# Altium PCB FLATSAT.PcbDoc (part 2 of 2)
Units mil, origin at the board's own origin, x right, y up, seen from the top; angles counter-clockwise.
Board outline 6000 x 4000 mil, 2 copper layers (Top Layer, Bottom Layer); 608 components, 657 nets, 2575 pads, 7 vias.
Unrouted connection lines stored in the file: 1377.
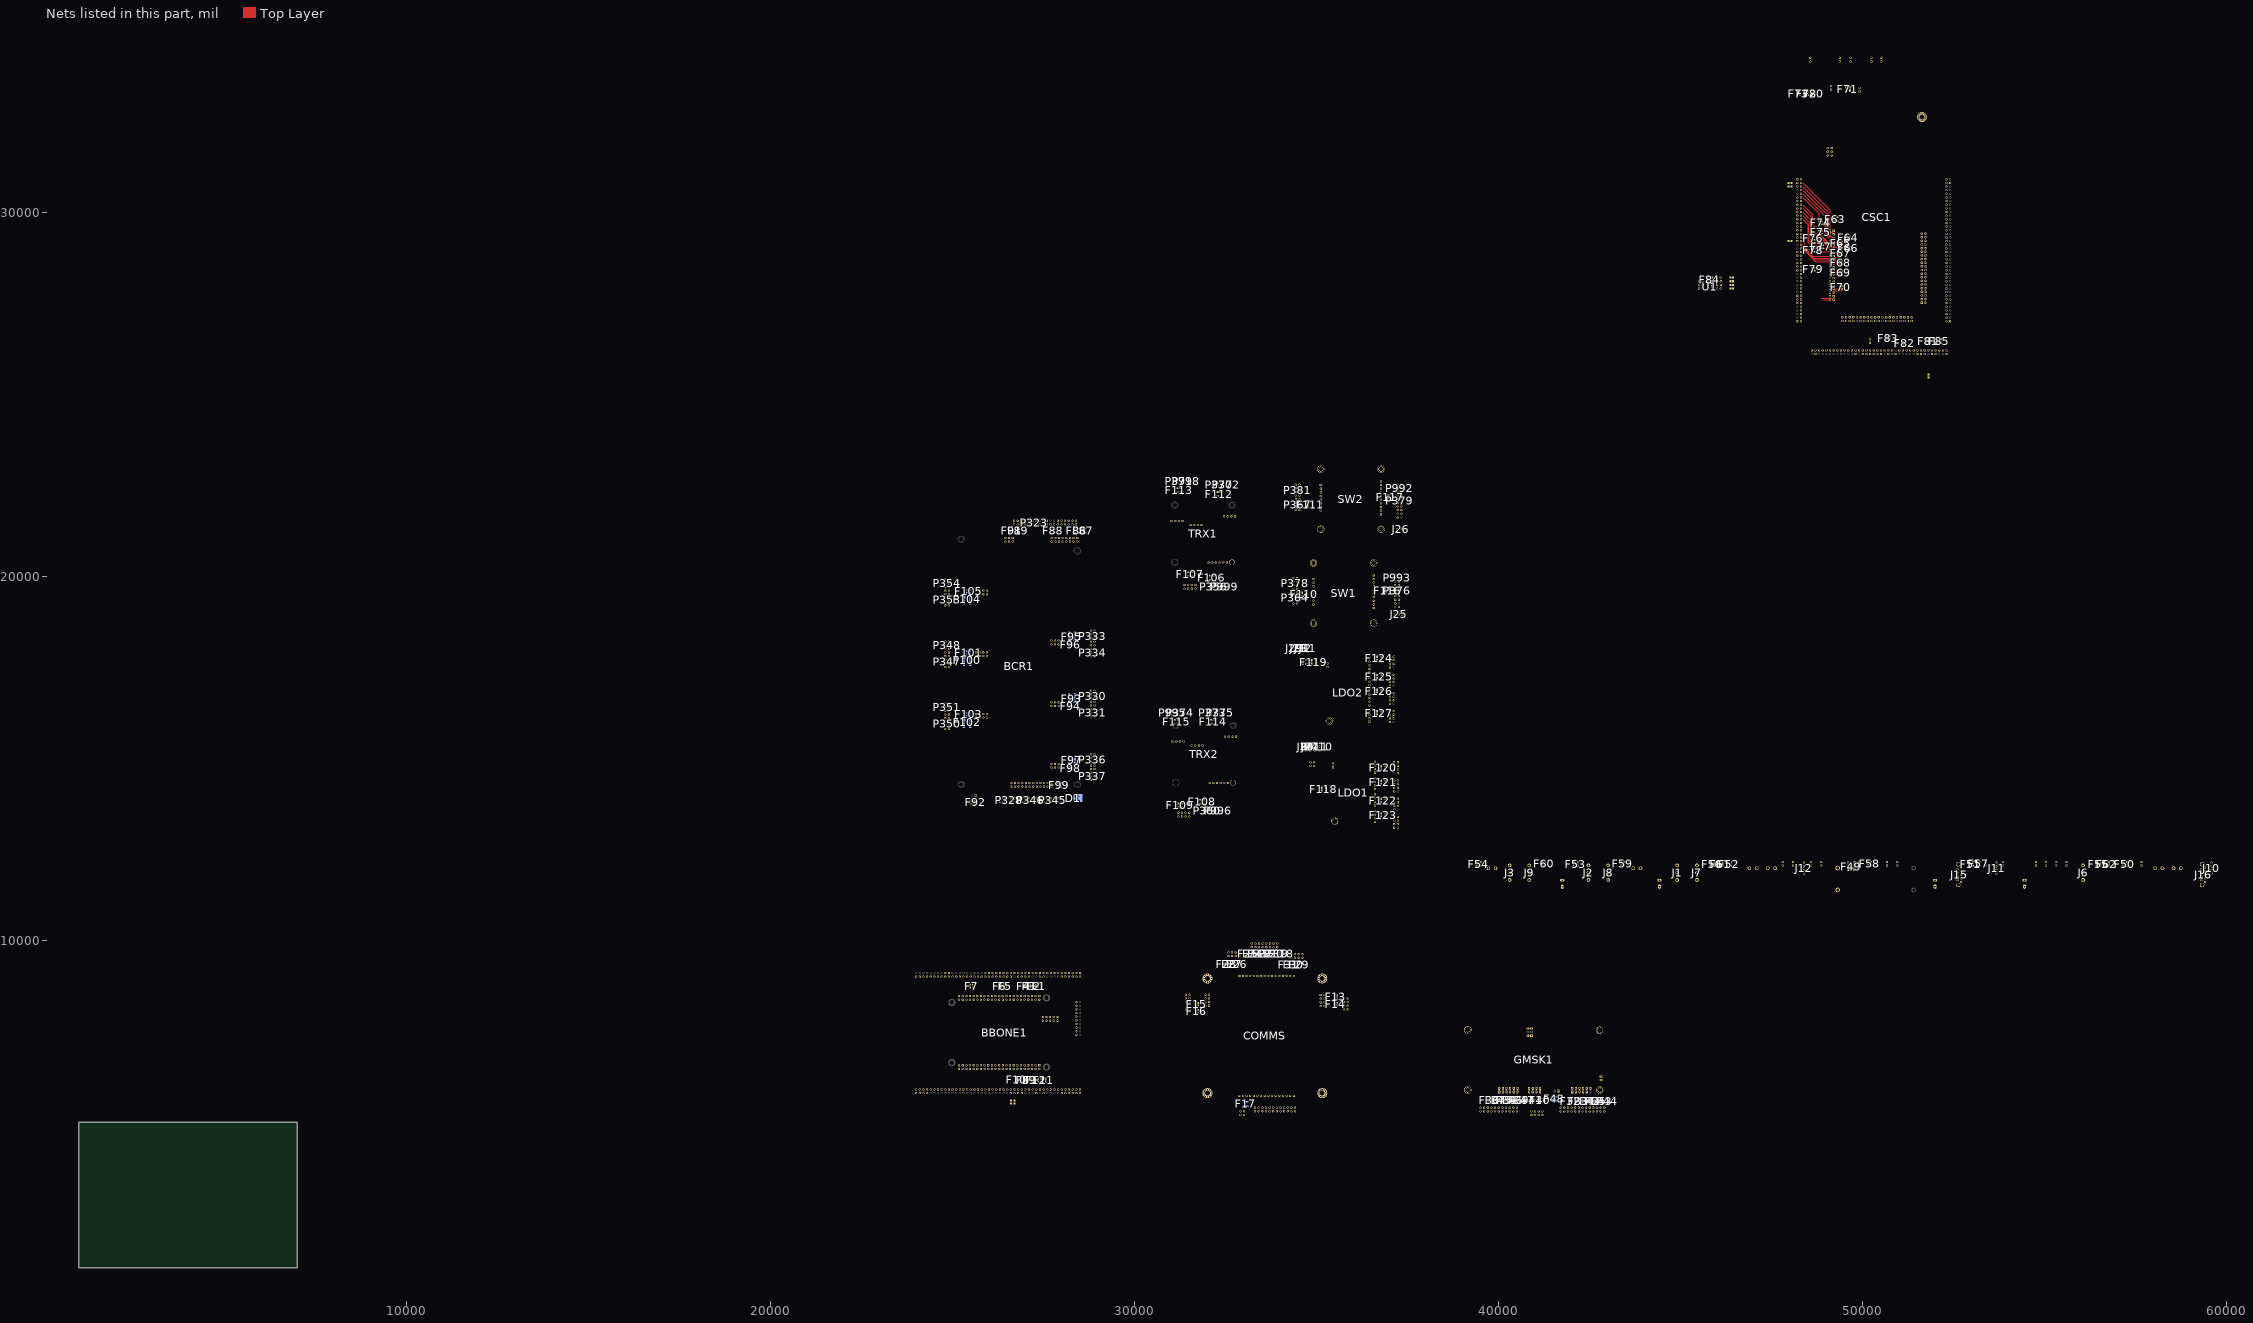
[diagram p2: the nets of this part, all layers, seen from the top]

## Footprints (in the part's own frame and the unit in brackets; to place one, negate y for a bottom-side part, rotate by r counter-clockwise, add the part's x,y. Pads: shape width x height; smd on the part's side, far side on the other; paste and mask are expansions set on the pad) (continued)
TRX_REGULATOR [mm]
  round 1.5 hole 0.9: 1(27.018,2.962) 1(29.558,2.962) 1(32.098,2.962) 2(3.65,32.045) 2(34.638,2.962) 2(37.178,2.962) 2(42.791,35.27) 3(19.474,29.149) 4(16.934,29.149) 5(37.711,35.27) 5(40.251,35.27) 6(6.19,32.045) 6(8.73,32.045) 7(14.394,29.149)
  rect 1.5x1.5 hole 0.9: 2(1.11,32.045) 2(22.014,29.149) 2(39.718,2.962) 2(45.331,35.27)
  round 4 hole 3.5: 4(43.291,3.161)
  round 5 hole 3: 8C(3.291,3.161) 8C(3.291,43.161) 8C(43.291,43.161)
  round 1 hole 0.3: GND(1.291,3.161) GND(1.291,43.161) GND(1.559,2.161) GND(1.559,4.161) GND(1.559,42.161) GND(1.559,44.161) GND(2.291,1.429) GND(2.291,4.893) GND(2.291,41.429) GND(2.291,44.893) GND(3.291,1.161) GND(3.291,5.161) GND(3.291,41.161) GND(3.291,45.161) GND(4.291,1.429) GND(4.291,4.893) GND(4.291,41.429) GND(4.291,44.893) GND(5.023,2.161) GND(5.023,4.161) GND(5.023,42.161) GND(5.023,44.161) GND(5.291,3.161) GND(5.291,43.161) GND(41.291,43.161) GND(41.559,42.161) GND(41.559,44.161) GND(42.291,41.429) GND(42.291,44.893) GND(43.291,41.161) GND(43.291,45.161) GND(44.291,41.429) GND(44.291,44.893) GND(45.023,42.161) GND(45.023,44.161) GND(45.291,43.161)
  silkscreen extent -0.41,-0.54 46.98,46.86
TSSOP50P310X90-8N [mm] "TSSOP, 8-Leads, Body 2.1x2.4mm (max), Pitch 0.50mm, IPC Medium Density"
  oval 1.25x0.3 smd mask+0.102: 1(-1.325,0.75) 2(-1.325,0.25)
  oval 1.25x0.3 smd: 3(-1.325,-0.25) 4(-1.325,-0.75) 5(1.325,-0.75) 6(1.325,-0.25) 7(1.325,0.25) 8(1.325,0.75)
  silkscreen extent -1.45,-1.05 0.3,1.57, body extent -1.2,-1.05 1.2,1.05, height 0.9

## Part data
C1: library part "0805 MLCC - X7R, 10%", "0805 MLCC - X7R, 10%"
CSC1: library part CSC
D1: library part "D Schottky", "Schottky Diode"
J1 J2 J3 J6 J7 J8 J9 J25 J26 J27 J28 J29 J30 J31 J32 P410 P411: library part "Header 3", "Header, 3-Pin"
J4 J5: library part Socket, "Socket"
J10 J11 J12: library part "Header 4", "Header, 4-Pin"
J13 J14 J17 J18 J23 J24: library part "Header 2", "Header, 2-Pin"
J15 J16: library part "D Connector 9", "Receptacle Assembly, 9 Position, Right Angle"
J19 J20 J21 J22: "RCA Phono Jack, Right Angle, Thru-Hole, Snap-In"
LDO1 LDO2: library part LDO
R1 R2 R3 R4 R5 R6 R7 R8 R9: library part "1206 Thick Film Resistor 1%", "1206 Thick Film Resistor 1%"
SW1 SW2: library part LVSWITCHER

## Via types
v1: diameter 19.68, hole 11.81, Top Layer to Bottom Layer, tented bottom, 5 vias
v2: diameter 27.56, hole 11.81, Top Layer to Bottom Layer, tented both sides, 2 vias

## Nets (pads, with @x,y where several pads share a name; then routed paths per layer and width w, separated by ;. In a path a pad name is that pad's centre, name@x,y a point inside that pad or via, vN(x,y) a via of type N, cw(c..) or ccw(c..) an arc to the next point about the centre after c; other vN are vias at no path point)
3V3_AUX: F53.1 P395.2
3V3_AUX_E\N\: P396.2 P411.2
3V3_BBONE: F52.1 P49.1 P50.1 R1.1 R2.1
3V3_COMMS: P123.1 P167.2 P389.2
3V3_CSC: F51.1 P173.1 P187.1 P207.1 P234.1 P274.1 P277.1 P392.2 R5.1 R6.1
3V3_PWR: P182.1 P321.1 P357.2 P361.2 P386.2 R3.1 R4.1
3V3_UNREG: J27.1 J30.1 P376.2 P382.1 P410.1 P411.1
5V0_AUX: F54.1 P407.2
5V0_AUX_E\N\: J32.2 P408.2
5V0_BBONE: P51.1 P52.1 P183.1 P404.2
5V0_BCR: P322.1 P398.2
5V0_TELEM: F50.1 P174.1 P401.2 R7.1 R8.1 R9.1
5V0_UNREG: J28.1 J29.1 J31.1 J32.1 P379.2 P383.1
8V0_RX1: F56.1 P370.2
8V0_RX2: F61.1 P373.2
AFSK1_DET: P108.1 P203.1
AFSK1_M0: P134.2 P256.2
AFSK1_M1: P135.2 P237.1
AFSK1_RX: P238.1
AFSK1_RXD: P133.2
AFSK1_TX: P257.2
AFSK1_TXD: P136.2
AFSK2_DET: P114.1 P199.1
AFSK2_M0: P138.2 P226.2
AFSK2_M1: P139.2 P204.1
AFSK2_RX: P239.1
AFSK2_RXD: P137.2
AFSK2_TX: P258.2
AFSK2_TXD: P140.2
BBONE_E\N\: J31.2 P405.2
BBONE_I2C2_SCL: J12.2 P65.1 R2.2
BBONE_I2C2_SDA: J12.3 P66.1 R1.2
BCR_E\N\: J28.2 P399.2
BCR_MISO: P180.1 P221.2 P326.1
BCR_MOSI: P181.1 P222.2 P327.1
BCR_R\S\T\: P178.1 P197.1 P324.1
BCR_SCK: P179.1 P220.2 P325.1
COMMS_E\N\: P390.2 P410.2
CSC_E\N\: J30.2 P393.2
CSC_ISP: P172.1 P232.2
CSC_RST: P171.1 P209.1
DTMF1Q1: P103.1 P212.2
DTMF1Q2: P104.1 P190.1
DTMF1Q3: P105.1 P213.2
DTMF1Q4: P106.1 P191.1
DTMF1ST: P107.1 P214.2
DTMF2Q1: P109.1 P192.1
DTMF2Q2: P110.1 P215.2
DTMF2Q3: P111.1 P193.1
DTMF2Q4: P112.1 P216.2
DTMF2ST: P113.1 P194.1
GND: C1.1 F1.3 F2.3 F3.3 F4.3 F5.3 F6.3 F7.3 F8.3 F9.3 F10.3 F11.3 F12.3 F13.3 F14.3 F15.3 F16.3 F17.3 F18.3 F19.3 F20.3 F21.3 F22.3 F23.3 F24.3 F25.3 F26.3 F27.3 F28.3 F29.3 F30.3 F31.3 F32.3 F33.3 F34.3 F35.3 F36.3 F37.3 F38.3 F39.3 F40.3 F41.3 F42.3 F43.3 F44.3 F45.3 F46.3 F47.3 F48.3 F49.3 F50.3 F51.3 F52.3 F53.3 F54.3 F55.3 F56.3 F57.3 F58.3 F59.3 F60.3 F61.3 F62.3 F63.3 F64.3 F65.3 F66.3 F67.3 F68.3 F69.3 F70.3 F71.3 F72.3 F73.3 F74.3 F75.3 F76.3 F77.3 F78.3 F79.3 F80.3 F81.3 F82.3 F83.3 F84.3 F85.3 F86.3 F87.3 F88.3 F89.3 F91.3 F92.3 F93.3 F94.3 F95.3 F96.3 F97.3 F98.3 F99.3 F100.3 F101.3 F102.3 F103.3 F104.3 F105.3 F107.3 F108.3 F109.3 F110.3 F111.3 F113.3 F114.3 F115.3 F116.3 F117.3 F118.3 F119.3 F120.3 F121.3 F122.3 F123.3 F124.3 F125.3 F126.3 F127.3 J1.2 J2.2 J3.2 J5.1 J6.2 J7.2 J8.2 J9.2 J10.4 J11.4 J12.4 J13.2 J14.2 J15.10 J15.11 J16.10 J16.11 J17.2 J18.2 J19.1A J20.1A J21.1A J22.1A J23.2 J24.2 J25.1 J26.1 J27.3 J28.3 J29.3 J30.3 J31.3 J32.3 P1.1 P2.1 P47.1 P48.1 P89.1 P90.1 P91.1 P92.1 P124.1 P168.2 P177.1 P186.1 P229.2 P230.2 P233.2 P273.2 P320.2 P323.1 P331.1 P334.1 P337.1 P346.2 P348.2 P351.2 P354.2 P372.2 P375.2 P378.2 P381.2 P384.1 P385.1 P410.3 P411.3 P984.1 P985.1 P986.1 P987.1 P988.1 P989.1 P990.1 P991.1 P992.2 P993.2 P994.2 P995.2 P996.2 P997.2 P998.2 P999.2 U1.1 | length 151.9
  Top Layer w10: v2(48525,28975) 48589.37,28910.63 F78.3@48600,28910.63 ; v2(48550,29235) 48599.37,29235 F76.3@48600,29235.63
I2C0_SCL: P188.1 P340.2 P359.1 P363.1 R4.2
I2C0_SDA: P210.2 P339.2 P358.1 P362.1 R3.2
I2C1_SCL: J11.2 P63.1 P184.1 P195.1
I2C1_SDA: J11.3 P64.1 P185.1 P217.2
I2C2_SCL: P175.1 P218.2 P275.1 P341.2 R6.2
I2C2_SCL_5V: J10.2 P299.2 R8.2
I2C2_SDA: P176.1 P235.1 P276.1 P342.2 R5.2
I2C2_SDA_5V: J10.3 P300.2 R7.2
NetBBONE1_A01: BBONE1.A01 P1.2
NetBBONE1_A02: BBONE1.A02 P2.2
NetBBONE1_A03: BBONE1.A03 F1.2
NetBBONE1_A04: BBONE1.A04 F2.2
NetBBONE1_A05: BBONE1.A05 F3.2
NetBBONE1_A06: BBONE1.A06 F4.2
NetBBONE1_A07: BBONE1.A07 P7.2
NetBBONE1_A08: BBONE1.A08 P8.2
NetBBONE1_A09: BBONE1.A09 P9.2
NetBBONE1_A10: BBONE1.A10 P10.2
NetBBONE1_A11: BBONE1.A11 P11.2
NetBBONE1_A12: BBONE1.A12 P12.2
NetBBONE1_A13: BBONE1.A13 P13.2
NetBBONE1_A14: BBONE1.A14 P14.2
NetBBONE1_A15: BBONE1.A15 P15.2
NetBBONE1_A16: BBONE1.A16 P16.2
NetBBONE1_A17: BBONE1.A17 P17.2
NetBBONE1_A18: BBONE1.A18 P18.2
NetBBONE1_A19: BBONE1.A19 P19.2
NetBBONE1_A20: BBONE1.A20 F5.2
NetBBONE1_A21: BBONE1.A21 F6.2
NetBBONE1_A22: BBONE1.A22 P22.2
NetBBONE1_A23: BBONE1.A23 P23.2
NetBBONE1_A24: BBONE1.A24 P24.2
NetBBONE1_A25: BBONE1.A25 P25.2
NetBBONE1_A26: BBONE1.A26 P26.2
NetBBONE1_A27: BBONE1.A27 P27.2
NetBBONE1_A28: BBONE1.A28 P28.2
NetBBONE1_A29: BBONE1.A29 P29.2
NetBBONE1_A30: BBONE1.A30 P30.2
NetBBONE1_A31: BBONE1.A31 P31.2
NetBBONE1_A32: BBONE1.A32 P32.2
NetBBONE1_A33: BBONE1.A33 P33.2
NetBBONE1_A34: BBONE1.A34 P34.2
NetBBONE1_A35: BBONE1.A35 P35.2
NetBBONE1_A36: BBONE1.A36 P36.2
NetBBONE1_A37: BBONE1.A37 P37.2
NetBBONE1_A38: BBONE1.A38 F7.2
NetBBONE1_A39: BBONE1.A39 P39.2
NetBBONE1_A40: BBONE1.A40 P40.2
NetBBONE1_A41: BBONE1.A41 P41.2
NetBBONE1_A42: BBONE1.A42 P42.2
NetBBONE1_A43: BBONE1.A43 P43.2
NetBBONE1_A44: BBONE1.A44 P44.2
NetBBONE1_A45: BBONE1.A45 P45.2
NetBBONE1_A46: BBONE1.A46 P46.2
NetBBONE1_B01: BBONE1.B01 P47.2
NetBBONE1_B02: BBONE1.B02 P48.2
NetBBONE1_B03: BBONE1.B03 F11.1
NetBBONE1_B04: BBONE1.B04 F12.1
NetBBONE1_B05: BBONE1.B05 F8.2
NetBBONE1_B06: BBONE1.B06 F9.2
NetBBONE1_B07: BBONE1.B07 P53.2
NetBBONE1_B08: BBONE1.B08 P54.2
NetBBONE1_B09: BBONE1.B09 P55.2
NetBBONE1_B10: BBONE1.B10 P56.2
NetBBONE1_B11: BBONE1.B11 F10.2
NetBBONE1_B12: BBONE1.B12 P58.2
NetBBONE1_B13: BBONE1.B13 P59.2
NetBBONE1_B14: BBONE1.B14 P60.2
NetBBONE1_B15: BBONE1.B15 P61.2
NetBBONE1_B16: BBONE1.B16 P62.2
NetBBONE1_B17: BBONE1.B17 P63.2
NetBBONE1_B18: BBONE1.B18 P64.2
NetBBONE1_B19: BBONE1.B19 P65.2
NetBBONE1_B20: BBONE1.B20 P66.2
NetBBONE1_B21: BBONE1.B21 P67.2
NetBBONE1_B22: BBONE1.B22 P68.2
NetBBONE1_B23: BBONE1.B23 P69.2
NetBBONE1_B24: BBONE1.B24 P70.2
NetBBONE1_B25: BBONE1.B25 P71.2
NetBBONE1_B26: BBONE1.B26 P72.2
NetBBONE1_B27: BBONE1.B27 P73.2
NetBBONE1_B28: BBONE1.B28 P74.2
NetBBONE1_B29: BBONE1.B29 P75.2
NetBBONE1_B30: BBONE1.B30 P76.2
NetBBONE1_B31: BBONE1.B31 P77.2
NetBBONE1_B32: BBONE1.B32 P78.2
NetBBONE1_B33: BBONE1.B33 P79.2
NetBBONE1_B34: BBONE1.B34 P80.2
NetBBONE1_B35: BBONE1.B35 P81.2
NetBBONE1_B36: BBONE1.B36 P82.2
NetBBONE1_B37: BBONE1.B37 P83.2
NetBBONE1_B38: BBONE1.B38 P84.2
NetBBONE1_B39: BBONE1.B39 P85.2
NetBBONE1_B40: BBONE1.B40 P86.2
NetBBONE1_B41: BBONE1.B41 P87.2
NetBBONE1_B42: BBONE1.B42 P88.2
NetBBONE1_B43: BBONE1.B43 P89.2
NetBBONE1_B44: BBONE1.B44 P90.2
NetBBONE1_B45: BBONE1.B45 P91.2
NetBBONE1_B46: BBONE1.B46 P92.2
NetBBONE1_P01: BBONE1.P01 P93.2
NetBBONE1_P02: BBONE1.P02 P94.2
NetBBONE1_P03: BBONE1.P03 P95.2
NetBBONE1_P04: BBONE1.P04 P96.2
NetBBONE1_P05: BBONE1.P05 P97.2
NetBBONE1_P06: BBONE1.P06 P98.2
NetBBONE1_P07: BBONE1.P07 P99.2
NetBBONE1_P08: BBONE1.P08 P100.2
NetBBONE1_P09: BBONE1.P09 P101.2
NetBBONE1_P10: BBONE1.P10 P102.2
NetBCR1_1: BCR1.1 F86.2
NetBCR1_2: BCR1.2 F87.2
NetBCR1_3: BCR1.3 P323.2
NetBCR1_4: BCR1.4 F88.2
NetBCR1_5: BCR1.5 P339.1
NetBCR1_6: BCR1.6 P340.1
NetBCR1_7: BCR1.7 P341.1
NetBCR1_8: BCR1.8 P342.1
NetBCR1_9: BCR1.9 P343.1
NetBCR1_10: BCR1.10 P344.1
NetBCR1_11: BCR1.11 P328.2
NetBCR1_12: BCR1.12 F92.2
NetBCR1_13: BCR1.13 F99.1
NetBCR1_14: BCR1.14 P346.1
NetBCR1_15: BCR1.15 F93.2
NetBCR1_16: BCR1.16 P331.2
NetBCR1_17: BCR1.17 F94.2
NetBCR1_18: BCR1.18 F95.2
NetBCR1_19: BCR1.19 P334.2
NetBCR1_20: BCR1.20 F96.2
NetBCR1_21: BCR1.21 F97.2
NetBCR1_22: BCR1.22 P337.2
NetBCR1_23: BCR1.23 F98.2
NetBCR1_24: BCR1.24 F100.2
NetBCR1_25: BCR1.25 P348.1
NetBCR1_26: BCR1.26 F101.2
NetBCR1_27: BCR1.27 F102.2
NetBCR1_28: BCR1.28 P351.1
NetBCR1_29: BCR1.29 F103.2
NetBCR1_30: BCR1.30 F104.2
NetBCR1_31: BCR1.31 P354.1
NetBCR1_32: BCR1.32 F105.2
NetBCR1_33: BCR1.33 F89.2
NetBCR1_34: BCR1.34 P326.2
NetBCR1_35: BCR1.35 F91.2
NetC1_2: C1.2 P297.2 P298.2 R9.2
NetCOMMS_AFSK1_M0: COMMS.AFSK1_M0 F26.2
NetCOMMS_AFSK1_M1: COMMS.AFSK1_M1 F27.2
NetCOMMS_AFSK1_RXD: COMMS.AFSK1_RXD P133.1
NetCOMMS_AFSK1_TXD: COMMS.AFSK1_TXD F28.2
NetCOMMS_AFSK2_M0: COMMS.AFSK2_M0 F29.2
NetCOMMS_AFSK2_M1: COMMS.AFSK2_M1 F30.2
NetCOMMS_AFSK2_RXD: COMMS.AFSK2_RXD P137.1
NetCOMMS_AFSK2_TXD: COMMS.AFSK2_TXD F31.2
NetCOMMS_DTMF1_ES: COMMS.DTMF1_ES P108.2
NetCOMMS_DTMF1_Q1: COMMS.DTMF1_Q1 P103.2
NetCOMMS_DTMF1_Q2: COMMS.DTMF1_Q2 P104.2
NetCOMMS_DTMF1_Q3: COMMS.DTMF1_Q3 P105.2
NetCOMMS_DTMF1_Q4: COMMS.DTMF1_Q4 P106.2
NetCOMMS_DTMF1_ST: COMMS.DTMF1_ST P107.2
NetCOMMS_DTMF2_ES: COMMS.DTMF2_ES P114.2
NetCOMMS_DTMF2_Q1: COMMS.DTMF2_Q1 P109.2
NetCOMMS_DTMF2_Q2: COMMS.DTMF2_Q2 P110.2
NetCOMMS_DTMF2_Q3: COMMS.DTMF2_Q3 P111.2
NetCOMMS_DTMF2_Q4: COMMS.DTMF2_Q4 P112.2
NetCOMMS_DTMF2_ST: COMMS.DTMF2_ST P113.2
NetCOMMS_GMSK_RX1: COMMS.GMSK_RX1 P117.2
NetCOMMS_GMSK_RX2: COMMS.GMSK_RX2 P118.2
NetCOMMS_GMSK_TX1: COMMS.GMSK_TX1 F13.2
NetCOMMS_GMSK_TX2: COMMS.GMSK_TX2 F14.2
NetCOMMS_GND: COMMS.GND P124.2
NetCOMMS_RX1: COMMS.RX1 F15.2
NetCOMMS_RX2: COMMS.RX2 F16.2
NetCOMMS_S0: COMMS.S0 F18.2
NetCOMMS_S1: COMMS.S1 F19.2
NetCOMMS_S2: COMMS.S2 F20.2
NetCOMMS_S3: COMMS.S3 F21.2
NetCOMMS_S4: COMMS.S4 F22.2
NetCOMMS_S5: COMMS.S5 F23.2
NetCOMMS_S6: COMMS.S6 F24.2
NetCOMMS_S7: COMMS.S7 F25.2
NetCOMMS_TX1: COMMS.TX1 P119.2
NetCOMMS_TX2: COMMS.TX2 P120.2
NetCOMMS_VCC: COMMS.VCC F17.2
NetCSC1_C1_1: CSC1.C1_1 F63.2
NetCSC1_C1_2: CSC1.C1_2 P210.1 | length 1623.2
  Top Layer w10: 48350,30800 49099.68,30050.31 CSC1.C1_2@49099.68,29487.36
NetCSC1_C1_3: CSC1.C1_3 P188.2 | length 1700.6
  Top Layer w10: 48350,30700 49050,30000 49050,29475.56 49081.67,29443.88 49143.17,29443.88 CSC1.C1_3@49199.68,29387.36
NetCSC1_C1_4: CSC1.C1_4 P211.1 | length 1544.9
  Top Layer w10: 48350,30600 49025,29925 49025,29425 49062.64,29387.36 CSC1.C1_4@49099.68,29387.36
NetCSC1_C1_5: CSC1.C1_5 P189.2 | length 1615.6
  Top Layer w10: 48350,30500 49000,29850 49000,29400 49069.16,29330.84 49117.7,29330.84 49161.18,29287.36 CSC1.C1_5@49199.68,29287.36
NetCSC1_C1_6: CSC1.C1_6 F74.2 | length 522
  Top Layer w10: F74.2@48878.74,29660.63 48939.37,29660.63 48975,29625 48975,29375 49062.64,29287.36 CSC1.C1_6@49099.68,29287.36
NetCSC1_C1_7: CSC1.C1_7 F64.2
NetCSC1_C1_8: CSC1.C1_8 F75.2 | length 351.1
  Top Layer w10: F75.2@48878.74,29410.63 48878.74,29346.26 49037.64,29187.36 CSC1.C1_8@49099.68,29187.36
NetCSC1_C1_9: CSC1.C1_9 F65.2
NetCSC1_C1_10: CSC1.C1_10 F76.2 | length 482.4
  Top Layer w10: F76.2@48678.74,29235.63 48889.37,29235.63 49037.64,29087.36 CSC1.C1_10@49099.68,29087.36
NetCSC1_C1_11: CSC1.C1_11 F66.2
NetCSC1_C1_12: CSC1.C1_12 F77.2 | length 230.6
  Top Layer w10: F77.2@48878.74,29010.63 49076.42,29010.63 CSC1.C1_12@49099.68,28987.36
NetCSC1_C1_13: CSC1.C1_13 F67.2 | length 188.3
  Top Layer w10: CSC1.C1_13@49199.68,28887.36 49262.64,28887.36 49328.74,28821.26 F67.2@49360.63,28821.26
NetCSC1_C1_14: CSC1.C1_14 F78.2 | length 430.6
  Top Layer w10: F78.2@48678.74,28910.63 49076.42,28910.63 CSC1.C1_14@49099.68,28887.36
NetCSC1_C1_15: CSC1.C1_15 F68.2 | length 330.7
  Top Layer w10: CSC1.C1_15@49199.68,28787.36 49250,28737.05 49250,28600 49278.74,28571.26 F68.2@49360.63,28571.26
NetCSC1_C1_16: CSC1.C1_16 P217.1 | length 1202.2
  Top Layer w10: 48350,29400 48400,29350 48400,29067.88 48473,28994.88 48473,28942.51 48631.56,28783.94 49096.27,28783.94 CSC1.C1_16@49099.68,28787.36
NetCSC1_C1_17: CSC1.C1_17 P195.2 | length 1014
  Top Layer w10: 48375,29070.25 48457,28988.25 48457,28935.88 48657.88,28735 49152.05,28735 CSC1.C1_17@49199.68,28687.36
NetCSC1_C1_18: CSC1.C1_18 P218.1 | length 964.9
  Top Layer w10: P218.1@48300,29175 P218.1@48300,29200 ; 48350,29072.63 48441,28981.63 48441,28929.25 48682.89,28687.36 CSC1.C1_18@49099.68,28687.36
NetCSC1_C1_19: CSC1.C1_19 P196.2 | length 1142.7
  Top Layer w10: P196.2@48300,29100 48425,28975 48425,28922.63 48712.63,28635 49152.05,28635 CSC1.C1_19@49199.68,28587.36
NetCSC1_C1_20: CSC1.C1_20 P219.1
NetCSC1_C1_21: CSC1.C1_21 P197.2
NetCSC1_C1_22: CSC1.C1_22 P220.1
NetCSC1_C1_23: CSC1.C1_23 P198.2
NetCSC1_C1_24: CSC1.C1_24 F79.2
NetCSC1_C1_25: CSC1.C1_25 F69.2 | length 159.8
  Top Layer w10: CSC1.C1_25@49199.68,28287.36 F69.2@49359.53,28287.36
NetCSC1_C1_26: CSC1.C1_26 P222.1
NetCSC1_C1_27: CSC1.C1_27 P200.2
NetCSC1_C1_28: CSC1.C1_28 P223.1
NetCSC1_C1_29: CSC1.C1_29 P201.2
NetCSC1_C1_30: CSC1.C1_30 P224.1 | length 4.8
  Top Layer w10: CSC1.C1_30@49096.32,28084 CSC1.C1_30@49099.68,28087.36
NetCSC1_C1_31: CSC1.C1_31 P202.2
NetCSC1_C1_32: CSC1.C1_32 P225.1
NetCSC1_C1_33: CSC1.C1_33 F70.2 | length 157
  Top Layer w10: CSC1.C1_33@49199.68,27887.36 F70.2@49356.73,27887.36
NetCSC1_C1_34: CSC1.C1_34 P226.1
NetCSC1_C1_35: CSC1.C1_35 P204.2
NetCSC1_C1_36: CSC1.C1_36 P227.1
NetCSC1_C1_37: CSC1.C1_37 P205.2 | length 61.5
  Top Layer w10: 49156.2,27730.84 CSC1.C1_37@49199.68,27687.36
NetCSC1_C1_38: CSC1.C1_38 P228.1
NetCSC1_C1_39: CSC1.C1_39 P206.2 | length 359.4
  Top Layer w10: 48860,27635 49140,27635 49187.64,27587.36 CSC1.C1_39@49199.68,27587.36
NetCSC1_C1_40: CSC1.C1_40 P229.1 | length 187.3
  Top Layer w10: 48912.36,27587.36 CSC1.C1_40@49099.68,27587.36
NetCSC1_C2_1: CSC1.C2_1 F81.2
NetCSC1_C2_2: CSC1.C2_2 P254.1
NetCSC1_C2_3: CSC1.C2_3 P235.2
NetCSC1_C2_4: CSC1.C2_4 P255.1
NetCSC1_C2_5: CSC1.C2_5 P236.2
NetCSC1_C2_6: CSC1.C2_6 P256.1
NetCSC1_C2_7: CSC1.C2_7 P237.2
NetCSC1_C2_8: CSC1.C2_8 P257.1
NetCSC1_C2_9: CSC1.C2_9 F82.2
NetCSC1_C2_10: CSC1.C2_10 P258.1
NetCSC1_C2_11: CSC1.C2_11 F83.2
NetCSC1_C2_12: CSC1.C2_12 P259.1
NetCSC1_C2_13: CSC1.C2_13 P240.2
NetCSC1_C2_14: CSC1.C2_14 P260.1
NetCSC1_C2_15: CSC1.C2_15 P241.2
NetCSC1_C2_16: CSC1.C2_16 P261.1
NetCSC1_C2_17: CSC1.C2_17 P242.2
NetCSC1_C2_18: CSC1.C2_18 P262.1
NetCSC1_C2_19: CSC1.C2_19 P243.2
NetCSC1_C2_20: CSC1.C2_20 P263.1
NetCSC1_C2_21: CSC1.C2_21 P244.2
NetCSC1_C2_22: CSC1.C2_22 P264.1
NetCSC1_C2_23: CSC1.C2_23 P245.2
NetCSC1_C2_24: CSC1.C2_24 P265.1
NetCSC1_C2_25: CSC1.C2_25 P246.2
NetCSC1_C2_26: CSC1.C2_26 P266.1
NetCSC1_C2_27: CSC1.C2_27 P247.2
NetCSC1_C2_28: CSC1.C2_28 P267.1
NetCSC1_C2_29: CSC1.C2_29 P248.2
NetCSC1_C2_30: CSC1.C2_30 P268.1
NetCSC1_C2_31: CSC1.C2_31 P249.2
NetCSC1_C2_32: CSC1.C2_32 P269.1
NetCSC1_C2_33: CSC1.C2_33 P250.2
NetCSC1_C2_34: CSC1.C2_34 P270.1
NetCSC1_C2_35: CSC1.C2_35 P251.2
NetCSC1_C2_36: CSC1.C2_36 P271.1
NetCSC1_C2_37: CSC1.C2_37 P252.2
NetCSC1_C2_38: CSC1.C2_38 P272.1
NetCSC1_C2_39: CSC1.C2_39 P253.2
NetCSC1_C2_40: CSC1.C2_40 P273.1
NetCSC1_C3_1: CSC1.C3_1 F85.2
NetCSC1_C3_2: CSC1.C3_2 P301.1
NetCSC1_C3_3: CSC1.C3_3 P278.2
NetCSC1_C3_4: CSC1.C3_4 P302.1
NetCSC1_C3_5: CSC1.C3_5 P279.2
NetCSC1_C3_6: CSC1.C3_6 P303.1
NetCSC1_C3_7: CSC1.C3_7 P280.2
NetCSC1_C3_8: CSC1.C3_8 P304.1
NetCSC1_C3_9: CSC1.C3_9 P281.2
NetCSC1_C3_10: CSC1.C3_10 P305.1
NetCSC1_C3_11: CSC1.C3_11 P282.2
NetCSC1_C3_12: CSC1.C3_12 P306.1
NetCSC1_C3_13: CSC1.C3_13 P283.2
NetCSC1_C3_14: CSC1.C3_14 P307.1
NetCSC1_C3_15: CSC1.C3_15 P284.2
NetCSC1_C3_16: CSC1.C3_16 P308.1
NetCSC1_C3_17: CSC1.C3_17 P285.2
NetCSC1_C3_18: CSC1.C3_18 P309.1
NetCSC1_C3_19: CSC1.C3_19 P286.2
NetCSC1_C3_20: CSC1.C3_20 P310.1
NetCSC1_C3_21: CSC1.C3_21 P287.2
NetCSC1_C3_22: CSC1.C3_22 P311.1
NetCSC1_C3_23: CSC1.C3_23 P288.2
NetCSC1_C3_24: CSC1.C3_24 P312.1
NetCSC1_C3_25: CSC1.C3_25 P289.2
NetCSC1_C3_26: CSC1.C3_26 P313.1
NetCSC1_C3_27: CSC1.C3_27 P290.2
NetCSC1_C3_28: CSC1.C3_28 P314.1
NetCSC1_C3_29: CSC1.C3_29 P291.2
NetCSC1_C3_30: CSC1.C3_30 P315.1
NetCSC1_C3_31: CSC1.C3_31 P292.2
NetCSC1_C3_32: CSC1.C3_32 P316.1
NetCSC1_C3_33: CSC1.C3_33 P293.2
NetCSC1_C3_34: CSC1.C3_34 P317.1
NetCSC1_C3_35: CSC1.C3_35 P294.2
NetCSC1_C3_36: CSC1.C3_36 P318.1
NetCSC1_C3_37: CSC1.C3_37 P295.2
NetCSC1_C3_38: CSC1.C3_38 P319.1
NetCSC1_C3_39: CSC1.C3_39 P296.2
NetCSC1_C3_40: CSC1.C3_40 P320.1
NetCSC1_GND: CSC1.GND P230.1
NetCSC1_ISP1: CSC1.ISP1 F71.2
NetCSC1_ISP2: CSC1.ISP2 F72.2
NetCSC1_ISP3: CSC1.ISP3 F73.2
NetCSC1_ISP4: CSC1.ISP4 P231.1
NetCSC1_ISP5: CSC1.ISP5 F80.2
NetCSC1_ISP6: CSC1.ISP6 P233.1
NetD1_1: D1.1 P345.2
NetF1_1: F1.1 P3.2
NetF2_1: F2.1 P4.2
NetF3_1: F3.1 P5.2
NetF4_1: F4.1 P6.2
NetF5_1: F5.1 P20.2
NetF6_1: F6.1 P21.2
NetF7_1: F7.1 P38.2
NetF8_1: F8.1 P51.2
NetF9_1: F9.1 P52.2
NetF10_1: F10.1 P57.2
NetF11_2: F11.2 P49.2
NetF12_2: F12.2 P50.2
NetF13_1: F13.1 P115.2
NetF14_1: F14.1 P116.2
NetF15_1: F15.1 P121.2
NetF16_1: F16.1 P122.2
NetF17_1: F17.1 P123.2
NetF18_1: F18.1 P125.1
NetF19_1: F19.1 P126.1
NetF20_1: F20.1 P127.1
NetF21_1: F21.1 P128.1
NetF22_1: F22.1 P129.1
NetF23_1: F23.1 P130.1
NetF24_1: F24.1 P131.1
NetF25_1: F25.1 P132.1
NetF26_1: F26.1 P134.1
NetF27_1: F27.1 P135.1
NetF28_1: F28.1 P136.1
NetF29_1: F29.1 P138.1
NetF30_1: F30.1 P139.1
NetF31_1: F31.1 P140.1
NetF32_1: F32.1 P141.2
NetF32_2: F32.2 GMSK1.1A
NetF33_1: F33.1 P143.2
NetF33_2: F33.2 GMSK1.5A
NetF34_1: F34.1 P144.2
NetF34_2: F34.2 GMSK1.7A
NetF35_1: F35.1 P145.2
NetF35_2: F35.2 GMSK1.9A
NetF36_1: F36.1 P146.2
NetF36_2: F36.2 GMSK1.1B
NetF37_1: F37.1 P148.2
NetF37_2: F37.2 GMSK1.5B
NetF38_1: F38.1 P149.2
NetF38_2: F38.2 GMSK1.7B
NetF39_1: F39.1 P150.2
NetF39_2: F39.2 GMSK1.9B
NetF40_1: F40.1 P152.2
NetF40_2: F40.2 GMSK1.3C
NetF41_1: F41.1 P154.2
NetF41_2: F41.2 GMSK1.7C
NetF42_1: F42.1 P158.1
NetF42_2: F42.2 GMSK1.8A
NetF43_1: F43.1 P159.1
NetF43_2: F43.2 GMSK1.10A
NetF44_1: F44.1 P160.1
NetF44_2: F44.2 GMSK1.12A
NetF45_1: F45.1 P164.1
NetF45_2: F45.2 GMSK1.8B
NetF46_1: F46.1 P165.1
NetF46_2: F46.2 GMSK1.10B
NetF47_1: F47.1 P166.1
NetF47_2: F47.2 GMSK1.12B
NetF48_1: F48.1 P167.1
NetF48_2: F48.2 GMSK1.2C
NetF50_2: F50.2 J10.1
NetF51_2: F51.2 J11.1
NetF52_2: F52.2 J12.1
NetF53_2: F53.2 J13.1
NetF54_2: F54.2 J14.1
NetF55_2: F55.2 J17.1
NetF56_2: F56.2 J18.1
NetF57_2: F57.2 J19.2B
NetF58_2: F58.2 J20.2B
NetF59_1: F59.1 J21.2B
NetF60_1: F60.1 J22.2B
NetF61_2: F61.2 J23.1
NetF62_2: F62.2 J24.1
NetF63_1: F63.1 P187.2
NetF64_1: F64.1 P190.2
NetF65_1: F65.1 P191.2 | length 1739.2
  Top Layer w10: 48350,30100 48600,29850 48600,29500 48750,29350 48825,29350 49035,29140 49240,29140 49314.37,29214.37 49400,29214.37 F65.1@49439.37,29175
NetF66_1: F66.1 P192.2 | length 2002.8
  Top Layer w10: 48350,29900 48525,29725 48525,29200 48575,29150 48925,29150 49040,29035 49460,29035 49525,29100 49589.37,29100 F66.1@49639.37,29050
NetF67_1: F67.1 P193.2
NetF68_1: F68.1 P194.2
NetF69_1: F69.1 P199.2 | length 364
  Top Layer w10: 49240,28335 49330,28425 49420,28425 49439.37,28405.63 F69.1@49439.37,28365 F69.1@49439.37,28286.26
NetF70_1: F70.1 P203.2 | length 383
  Top Layer w10: 49180,27835 49420,27835 49439.37,27854.37 F70.1@49439.37,27891.26 F70.1@49439.37,27970
NetF71_1: F71.1 P207.2
NetF72_1: F72.1 P208.2
NetF73_1: F73.1 P209.2
NetF74_1: F74.1 P212.1 | length 847
  Top Layer w10: 48350,30400 48800,29950 F74.1@48800,29739.37
NetF75_1: F75.1 P213.1 | length 984.2
  Top Layer w10: 48350,30200 48625,29925 48625,29650 48785.63,29489.37 F75.1@48800,29489.37 F75.1@48878.74,29489.37
NetF76_1: F76.1 P214.1 | length 789.2
  Top Layer w10: 48350,30000 48575,29775 48575,29475 48600,29450 F76.1@48600,29314.37
NetF77_1: F77.1 P215.1 | length 1126.3
  Top Layer w10: 48350,29800 48500,29650 48500,29175 48585.63,29089.37 F77.1@48825,29089.37 F77.1@48903.74,29089.37
NetF78_1: F78.1 P216.1
NetF79_1: F79.1 P221.1 | length 78.7
  Top Layer w10: F79.1@48600,28466.37 F79.1@48678.74,28466.37
NetF80_1: F80.1 P232.1
NetF81_1: F81.1 P234.2
NetF82_1: F82.1 P238.2
NetF83_1: F83.1 P239.2
NetF84_1: F84.1 P274.2
NetF84_2: F84.2 U1.2
NetF85_1: F85.1 P277.2
NetF86_1: F86.1 P321.2
NetF87_1: F87.1 P322.2
NetF88_1: F88.1 P324.2
NetF89_1: F89.1 P325.2
NetF91_1: F91.1 P327.2
NetF92_1: F92.1 P329.2
NetF93_1: F93.1 P330.2
NetF94_1: F94.1 P332.2
NetF95_1: F95.1 P333.2
NetF96_1: F96.1 P335.2
NetF97_1: F97.1 P336.2
NetF98_1: F98.1 P338.2
NetF99_2: F99.2 P345.1
NetF100_1: F100.1 P347.1
NetF101_1: F101.1 P349.1
NetF102_1: F102.1 P350.1
NetF103_1: F103.1 P352.1
NetF104_1: F104.1 P353.1
NetF105_1: F105.1 P355.1
NetF106_1: F106.1 P356.2
NetF106_2: F106.2 TRX1.1
NetF107_1: F107.1 P357.1
NetF107_2: F107.2 TRX1.7
NetF108_1: F108.1 P360.2
NetF108_2: F108.2 TRX2.1
NetF109_1: F109.1 P361.1
NetF109_2: F109.2 TRX2.7
NetF110_1: F110.1 P364.2
NetF110_2: F110.2 SW1.Vin
NetF111_1: F111.1 P367.2
NetF111_2: F111.2 SW2.Vin
NetF112_1: F112.1 TRX1.5
NetF112_2: F112.2 P370.1
NetF113_1: F113.1 TRX1.6
NetF113_2: F113.2 P371.1
NetF114_1: F114.1 TRX2.5
NetF114_2: F114.2 P373.1
NetF115_1: F115.1 TRX2.6
NetF115_2: F115.2 P374.1
NetF116_1: F116.1 SW1.Vout
NetF116_2: F116.2 P376.1
NetF117_1: F117.1 SW2.Vout
NetF117_2: F117.2 P379.1
NetF118_1: F118.1 P382.2
NetF118_2: F118.2 LDO1.VIN
NetF119_1: F119.1 P383.2
NetF119_2: F119.2 LDO2.VIN
NetF120_1: F120.1 LDO1.VOUT1
NetF120_2: F120.2 P386.1
NetF121_1: F121.1 LDO1.VOUT2
NetF121_2: F121.2 P389.1
NetF122_1: F122.1 LDO1.VOUT3
NetF122_2: F122.2 P392.1
NetF123_1: F123.1 LDO1.VOUT4
NetF123_2: F123.2 P395.1
NetF124_1: F124.1 LDO2.VOUT1
NetF124_2: F124.2 P398.1
NetF125_1: F125.1 LDO2.VOUT2
NetF125_2: F125.2 P401.1
NetF126_1: F126.1 LDO2.VOUT3
NetF126_2: F126.2 P404.1
NetF127_1: F127.1 LDO2.VOUT4
NetF127_2: F127.2 P407.1
NetGMSK1_1C: GMSK1.1C P151.2
NetGMSK1_2A: GMSK1.2A P155.1
NetGMSK1_2B: GMSK1.2B P161.1
NetGMSK1_3A: GMSK1.3A P142.2
NetGMSK1_3B: GMSK1.3B P147.2
NetGMSK1_4A: GMSK1.4A P156.1
NetGMSK1_4B: GMSK1.4B P162.1
NetGMSK1_5C: GMSK1.5C P153.2
NetGMSK1_6A: GMSK1.6A P157.1
NetGMSK1_6B: GMSK1.6B P163.1
NetGMSK1_8C: GMSK1.8C P168.1
NetJ15_1: J15.1 P169.2
NetJ15_2: J15.2 P171.2
NetJ15_3: J15.3 P173.2
NetJ15_4: J15.4 P175.2
NetJ15_5: J15.5 P177.2
NetJ15_6: J15.6 P170.2
NetJ15_7: J15.7 P172.2
NetJ15_8: J15.8 P174.2
NetJ15_9: J15.9 P176.2
NetJ16_1: J16.1 P178.2
NetJ16_2: J16.2 P180.2
NetJ16_3: J16.3 P182.2
NetJ16_4: J16.4 P184.2
NetJ16_5: J16.5 P186.2
NetJ16_6: J16.6 P179.2
NetJ16_7: J16.7 P181.2
NetJ16_8: J16.8 P183.2
NetJ16_9: J16.9 P185.2
NetJ25_2: J25.2 P365.1
NetJ26_2: J26.2 P368.1
NetLDO1_EN1: LDO1.EN1 P387.1
NetLDO1_EN2: LDO1.EN2 P390.1
NetLDO1_EN3: LDO1.EN3 P393.1
NetLDO1_EN4: LDO1.EN4 P396.1
NetLDO1_GND: LDO1.GND P385.2 P985.2 P989.2 P990.2 P991.2
NetLDO1_RST1: LDO1.RST1 P388.1
NetLDO1_RST2: LDO1.RST2 P391.1
NetLDO1_RST3: LDO1.RST3 P394.1
NetLDO1_RST4: LDO1.RST4 P397.1
NetLDO2_EN1: LDO2.EN1 P399.1
NetLDO2_EN2: LDO2.EN2 P402.1
NetLDO2_EN3: LDO2.EN3 P405.1
NetLDO2_EN4: LDO2.EN4 P408.1
NetLDO2_GND: LDO2.GND P384.2 P984.2 P986.2 P987.2 P988.2
NetLDO2_RST1: LDO2.RST1 P400.1
NetLDO2_RST2: LDO2.RST2 P403.1
NetLDO2_RST3: LDO2.RST3 P406.1
NetLDO2_RST4: LDO2.RST4 P409.1
NetP275_2: P275.2 U1.3
NetP276_2: P276.2 U1.4
NetP297_1: P297.1 U1.8
NetP298_1: P298.1 U1.7
NetP299_1: P299.1 U1.6
NetP300_1: P300.1 U1.5
NetP358_2: P358.2 TRX1.3
NetP359_2: P359.2 TRX1.4
NetP362_2: P362.2 TRX2.3
NetP363_2: P363.2 TRX2.4
NetP365_2: P365.2 SW1.EN
NetP366_2: P366.2 SW1.SYNC
NetP368_2: P368.2 SW2.EN
NetP369_2: P369.2 SW2.SYNC
NetP372_1: P372.1 P997.1 P998.1 P999.1 TRX1.2
NetP375_1: P375.1 P994.1 P995.1 P996.1 TRX2.2
NetP377_1: P377.1 SW1.PG
NetP378_1: P378.1 P993.1 SW1.GND
NetP380_1: P380.1 SW2.PG
NetP381_1: P381.1 P992.1 SW2.GND
PLLACQ1: P24.1 P160.2
PLLACQ2: P25.1 P166.2
PWR_E\N\: J27.2 P387.2
RX1_AF: F59.2 P121.1
RX1_GMSK: P117.1 P152.1
RX2_AF: F60.2 P122.1
RX2_GMSK: P118.1 P154.1
RX_PSAVE1: P15.1 P144.1
RX_PSAVE2: P16.1 P149.1
RX_S/N1: P20.1 P157.2
RX_S/N2: P21.1 P163.2
RXACQ1: P17.1 P145.1
RXACQ2: P18.1 P150.1
RXCLK1: P5.1 P156.2
RXCLK2: P6.1 P162.2
RXDATA1: P57.1 P142.1
RXDATA2: P38.1 P147.1
RXHOLD1: P11.1 P159.2
RXHOLD2: P12.1 P165.2
S0: P125.2 P263.2
S1: P126.2 P244.1
S2: P127.2 P264.2
S3: P128.2 P245.1
S4: P129.2 P265.2
S5: P130.2 P246.1
S6: P131.2 P266.2
S7: P132.2 P247.1
SOLA_X+_T: J1.3 P332.1
SOLA_X+_V: J1.1 P330.1
SOLA_X-_T: J7.3 P349.2
SOLA_X-_V: J7.1 P347.2
SOLA_Y+_T: J2.3 P335.1
SOLA_Y+_V: J2.1 P333.1
SOLA_Y-_T: J8.3 P352.2
SOLA_Y-_V: J8.1 P350.2
SOLA_Z+_T: J3.3 P338.1
SOLA_Z+_V: J3.1 P336.1
SOLA_Z-_T: J9.3 P355.2
SOLA_Z-_V: J9.1 P353.2
TBATT: J6.3 P329.1
TELEM_E\N\: J29.2 P402.2
TX1_AF: F57.1 P119.1
TX1_GMSK: P115.1 P151.1
TX2_AF: F58.1 P120.1
TX2_GMSK: P116.1 P153.1
TX_PSAVE1: P22.1 P158.2
TX_PSAVE2: P23.1 P164.2
TXCLK1: P3.1 P155.2
TXCLK2: P4.1 P161.2
TXDATA1: P59.1 P141.1
TXDATA2: P37.1 P146.1
TXEN1: P26.1 P143.1
TXEN2: P27.1 P148.1
UART0_RX: P170.1 P208.1
UART0_TX: P169.1 P231.2
V_BATT: J6.1 P328.1
V_LOAD: D1.2 F49.2 J25.3 J26.3 P356.1 P360.1 P364.1 P367.1
  other v1: 28375,13850 28475,13850 28425,13900 28375,13950 28475,13950
VVAR_TX1: F55.1 P371.2
VVAR_TX2: F62.1 P374.2
pads on no net: BBONE1.M1 BBONE1.M2 BBONE1.M3 BBONE1.M4 BCR1.0 F49.1 F106.3 F112.3 GMSK1. GMSK1.3 GMSK1.4 GMSK1.11A GMSK1.GND J4.1 P7.1 P8.1 P9.1 P10.1 P13.1 P14.1 P19.1 P28.1 P29.1 P30.1 P31.1 P32.1 P33.1 P34.1 P35.1 P36.1 P39.1 P40.1 P41.1 P42.1 P43.1 P44.1 P45.1 P46.1 P53.1 P54.1 P55.1 P56.1 P58.1 P60.1 P61.1 P62.1 P67.1 P68.1 P69.1 P70.1 P71.1 P72.1 P73.1 P74.1 P75.1 P76.1 P77.1 P78.1 P79.1 P80.1 P81.1 P82.1 P83.1 P84.1 P85.1 P86.1 P87.1 P88.1 P93.1 P94.1 P95.1 P96.1 P97.1 P98.1 P99.1 P100.1 P101.1 P102.1 P189.1 P196.1 P198.1 P200.1 P201.1 P202.1 P205.1 P206.1 P211.2 P219.2 P223.2 P224.2 P225.2 P227.2 P228.2 P236.1 P240.1 P241.1 P242.1 P243.1 P248.1 P249.1 P250.1 P251.1 P252.1 P253.1 P254.2 P255.2 P259.2 P260.2 P261.2 P262.2 P267.2 P268.2 P269.2 P270.2 P271.2 P272.2 P278.1 P279.1 P280.1 P281.1 P282.1 P283.1 P284.1 P285.1 P286.1 P287.1 P288.1 P289.1 P290.1 P291.1 P292.1 P293.1 P294.1 P295.1 P296.1 P301.2 P302.2 P303.2 P304.2 P305.2 P306.2 P307.2 P308.2 P309.2 P310.2 P311.2 P312.2 P313.2 P314.2 P315.2 P316.2 P317.2 P318.2 P319.2 P343.2 P344.2 P366.1 P369.1 P377.2 P380.2 P388.2 P391.2 P394.2 P397.2 P400.2 P403.2 P406.2 P409.2 TRX1.8C TRX1.GND TRX2.8C TRX2.GND
copper on no net: | length 6286.1
  Top Layer w10: 48350,29500 48425,29425 48425,29065.51 48489,29001.51 48489,28949.14 48603.14,28835 49254.37,28835 49439.37,28650 ; 48350,29600 48450,29500 48450,29125 48585.63,28989.37 48600,28989.37 48678.74,28989.37 ; 48350,29700 48475,29575 48475,29150 48575,29050 48700,29050 48725,29025 48725,28975 48760,28940 49250,28940 49260,28950 49400,28950 49439.37,28910.63 49439.37,28900 49439.37,28821.26 ; 48350,30300 48675,29975 48675,29650 48750,29575 48900,29575 48950,29525 48950,29350 49060,29240 49250,29240 ; 48425,29200 48450,29175 48450,29072.63 ; 48450,29300 48475,29275 48475,29070.25

## Keep-outs
Top Layer:
  lines w10: 49439.37,28571.26 49439.37,28650

## Text inside footprints (layer, text, board x,y; h text height)
BBONE1: Top Overlay "BEAGLEBONE" at 25621.14,7437.64 h150; Bottom Overlay "BEAGLEBONE" at 27077.83,7437.64 h150
BCR1: Top Overlay "Battery Charge Regulator" at 26828.35,16029.13 h150 r90; Bottom Overlay "Battery Charge Regulator" at 26828.35,19493.7 h150 r90
COMMS: Top Overlay "Communications" at 32554.45,7295.55 h150; Top Overlay "2" at 35191.61,8594.9 h50 r270; Top Overlay "1" at 35091.61,8574.9 h50 r270; Top Overlay "7" at 35091.61,8134.9 h50 r270; Top Overlay "8" at 35191.61,8134.9 h50 r270; Top Overlay "2" at 31962.72,8101.57 h50 r90; Top Overlay "1" at 32062.72,8121.57 h50 r90; Top Overlay "7" at 32062.72,8561.57 h50 r90; Top Overlay "8" at 31962.72,8561.57 h50 r90; Top Overlay "Switching Circuit" at 33902.95,8880.71 h39.37 r180; Top Overlay "S1" at 33893.11,8949.61 h39.37 r180; Top Overlay "S0" at 33991.54,8949.61 h39.37 r180; Top Overlay "TXD" at 34129.33,8949.61 h39.37 r180; Top Overlay "M0" at 34316.34,8949.61 h39.37 r180; Top Overlay "M1" at 34208.07,8949.61 h39.37 r180; Top Overlay "RXD" at 34444.29,8949.61 h39.37 r180; Top Overlay "AFSK2" at 34326.18,8880.71 h39.37 r180; Top Overlay "Q1" at 33853.74,5790.16 h39.37; Top Overlay "DTMF1" at 34030.91,5859.06 h39.37; Top Overlay "Q2" at 33942.32,5790.16 h39.37; Top Overlay "Q3" at 34040.75,5790.16 h39.37; Top Overlay "Q4" at 34139.17,5790.16 h39.37; Top Overlay "ST" at 34237.6,5790.16 h39.37; Top Overlay "ES" at 34336.02,5790.16 h39.37; Top Overlay "ES" at 33745.47,5790.16 h39.37; Top Overlay "ST" at 33647.05,5790.16 h39.37; Top Overlay "Q4" at 33548.62,5790.16 h39.37; Top Overlay "Q3" at 33450.2,5790.16 h39.37; Top Overlay "Q2" at 33351.77,5790.16 h39.37; Top Overlay "DTMF2" at 33440.35,5859.06 h39.37; Top Overlay "Q1" at 33263.19,5790.16 h39.37; Top Overlay "VCC" at 33066.34,5790.16 h39.37; Top Overlay "GND" at 32869.49,5790.16 h39.37; Top Overlay "S7" at 33312.4,8949.61 h39.37 r180; Top Overlay "S6" at 33410.83,8949.61 h39.37 r180; Top Overlay "S5" at 33499.41,8949.61 h39.37 r180; Top Overlay "S4" at 33597.83,8949.61 h39.37 r180; Top Overlay "S3" at 33696.26,8949.61 h39.37 r180; Top Overlay "S2" at 33804.53,8949.61 h39.37 r180; Top Overlay "AFSK1" at 33095.87,8880.71 h39.37 r180; Top Overlay "RXD" at 33223.82,8949.61 h39.37 r180; Top Overlay "M1" at 32977.76,8949.61 h39.37 r180; Top Overlay "M0" at 33086.02,8949.61 h39.37 r180; Top Overlay "TXD" at 32899.02,8949.61 h39.37 r180; Top Overlay "RX2" at 34936.42,8172.05 h39.37; Top Overlay "TX2" at 34936.42,8280.31 h39.37; Top Overlay "RX1" at 34946.26,8378.74 h39.37; Top Overlay "TX1" at 34936.42,8467.32 h39.37; Top Overlay "GMSK" at 35280.91,8437.8 h39.37 r270; Top Overlay "TX1" at 32117.52,8481.1 h39.37; Top Overlay "TX2" at 32113.58,8390.55 h39.37; Top Overlay "Radios" at 31875.39,8270.47 h39.37 r90; Top Overlay "RX2" at 32117.52,8174.02 h39.37; Top Overlay "RX1" at 32121.46,8268.5 h39.37; Bottom Overlay "Communications" at 34621.38,7295.55 h150
CSC1: Bottom Overlay "1" at 51644.09,27380.71 h50 r90; Bottom Overlay "2" at 51752.36,27390.55 h50 r90; Bottom Overlay "1" at 49174.61,29624.8 h50 r270; Bottom Overlay "2" at 49070.28,29611.02 h50 r270; Bottom Overlay "2" at 51457.09,27134.65 h50 r180; Bottom Overlay "1" at 51466.93,27026.38 h50 r180
GMSK1: Top Overlay "PWR" at 42826.02,6324.76 h47.24 r90; Top Overlay "GPIO2" at 40583.9,5991.1 h47.24 r270; Top Overlay "TRX" at 41202.99,5936.97 h47.24 r270; Top Overlay "BFR" at 41471.69,5904.49 h47.24 r180; Top Overlay "LP21" at 41126.42,7622.4 h47.24 r180; Top Overlay "GPIO1" at 42586.85,5979.29 h47.24 r270
J1: Top Overlay "+    -    T" at 45175.59,11636.89 h39.37 r90
J2: Top Overlay "+    -    T" at 42740.59,11636.89 h39.37 r90
J3: Top Overlay "+    -    T" at 40575.59,11636.89 h39.37 r90
J6: Top Overlay "+    -    T" at 56325.59,11636.89 h39.37 r90
J7: Top Overlay "+    -    T" at 45720.59,11636.89 h39.37 r90
J8: Top Overlay "+    -    T" at 43280.59,11636.89 h39.37 r90
J9: Top Overlay "+    -    T" at 41115.59,11636.89 h39.37 r90
J13: Top Overlay "+    -" at 43676.89,11699.41 h39.37
J14: Top Overlay "+    -" at 39696.89,11699.41 h39.37
J17: Top Overlay "+    -" at 58011.89,11699.41 h39.37
J18: Top Overlay "+    -" at 46866.89,11699.41 h39.37
J19: Mechanical 1 "Mech 2 - Clearance, move to internal plane if present" at 54190.32,11409.07 h11.81 r90; Mechanical 1 "Mech 1 - Slot cut-out" at 54170.63,11409.07 h11.81 r90; Mechanical 1 "Assign keep-out area to slot" at 54111.57,11409.07 h11.81 r90; Mechanical 1 "Slot 1.2x2.2mm, PTH" at 54150.94,11409.07 h11.81 r90; Mechanical 1 "Alert PCB fab to slot details" at 54131.26,11409.07 h11.81 r90; Mechanical 1 "PCB Edge" at 54621.8,11791.89 h9.84 r180
J20: Mechanical 1 "Mech 2 - Clearance, move to internal plane if present" at 51735.32,11409.07 h11.81 r90; Mechanical 1 "Mech 1 - Slot cut-out" at 51715.63,11409.07 h11.81 r90; Mechanical 1 "Assign keep-out area to slot" at 51656.57,11409.07 h11.81 r90; Mechanical 1 "Slot 1.2x2.2mm, PTH" at 51695.94,11409.07 h11.81 r90; Mechanical 1 "Alert PCB fab to slot details" at 51676.26,11409.07 h11.81 r90; Mechanical 1 "PCB Edge" at 52166.8,11791.89 h9.84 r180
J21: Mechanical 1 "Mech 2 - Clearance, move to internal plane if present" at 44165.32,11409.07 h11.81 r90; Mechanical 1 "Mech 1 - Slot cut-out" at 44145.63,11409.07 h11.81 r90; Mechanical 1 "Assign keep-out area to slot" at 44086.57,11409.07 h11.81 r90; Mechanical 1 "Slot 1.2x2.2mm, PTH" at 44125.94,11409.07 h11.81 r90; Mechanical 1 "Alert PCB fab to slot details" at 44106.26,11409.07 h11.81 r90; Mechanical 1 "PCB Edge" at 44596.8,11791.89 h9.84 r180
J22: Mechanical 1 "Mech 2 - Clearance, move to internal plane if present" at 41495.32,11409.07 h11.81 r90; Mechanical 1 "Mech 1 - Slot cut-out" at 41475.63,11409.07 h11.81 r90; Mechanical 1 "Assign keep-out area to slot" at 41416.57,11409.07 h11.81 r90; Mechanical 1 "Slot 1.2x2.2mm, PTH" at 41455.94,11409.07 h11.81 r90; Mechanical 1 "Alert PCB fab to slot details" at 41436.26,11409.07 h11.81 r90; Mechanical 1 "PCB Edge" at 41926.8,11791.89 h9.84 r180
J23: Top Overlay "+    -" at 47371.89,11699.41 h39.37
J24: Top Overlay "+    -" at 58516.89,11699.41 h39.37
LDO1: Top Overlay "VIN" at 35546.85,14832.6 h39.37; Top Overlay "GND" at 35546.85,14734.17 h39.37; Top Overlay "VOUT" at 36373.62,14871.97 h39.37; Top Overlay "GND" at 36373.62,14773.54 h39.37; Top Overlay "EN" at 36373.62,14675.12 h39.37; Top Overlay "RST" at 36373.62,14576.69 h39.37; Top Overlay "LDO2" at 36314.57,14205.43 h59.06 r90; Top Overlay "RST" at 36373.62,14126.69 h39.37; Top Overlay "EN" at 36373.62,14225.12 h39.37; Top Overlay "GND" at 36373.62,14323.54 h39.37; Top Overlay "VOUT" at 36373.62,14421.97 h39.37; Top Overlay "LDO3" at 36314.57,13755.43 h59.06 r90; Top Overlay "RST" at 36373.62,13676.69 h39.37; Top Overlay "EN" at 36373.62,13775.12 h39.37; Top Overlay "GND" at 36373.62,13873.54 h39.37; Top Overlay "VOUT" at 36373.62,13971.97 h39.37; Top Overlay "LDO4" at 36314.57,13305.43 h59.06 r90; Top Overlay "RST" at 36373.62,13226.69 h39.37; Top Overlay "EN" at 36373.62,13325.12 h39.37; Top Overlay "GND" at 36373.62,13423.54 h39.37; Top Overlay "VOUT" at 36373.62,13521.97 h39.37; Top Overlay "Low-Dropout" at 35842.13,13651.5 h78.74 r90; Top Overlay "Regulator" at 35999.61,13730.24 h78.74 r90; Bottom Overlay "Regulator" at 35999.61,14360.16 h78.74 r90; Bottom Overlay "Low-Dropout" at 35861.81,14458.58 h78.74 r90
LDO2: Top Overlay "VIN" at 35396.85,17582.6 h39.37; Top Overlay "GND" at 35396.85,17484.17 h39.37; Top Overlay "VOUT" at 36223.62,17621.97 h39.37; Top Overlay "GND" at 36223.62,17523.54 h39.37; Top Overlay "EN" at 36223.62,17425.12 h39.37; Top Overlay "RST" at 36223.62,17326.69 h39.37; Top Overlay "LDO1" at 36164.57,17405.43 h59.06 r90; Top Overlay "RST" at 36223.62,16876.69 h39.37; Top Overlay "EN" at 36223.62,16975.12 h39.37; Top Overlay "GND" at 36223.62,17073.54 h39.37; Top Overlay "VOUT" at 36223.62,17171.97 h39.37; Top Overlay "LDO3" at 36164.57,16505.43 h59.06 r90; Top Overlay "RST" at 36223.62,16426.69 h39.37; Top Overlay "EN" at 36223.62,16525.12 h39.37; Top Overlay "GND" at 36223.62,16623.54 h39.37; Top Overlay "VOUT" at 36223.62,16721.97 h39.37; Top Overlay "LDO4" at 36164.57,16055.43 h59.06 r90; Top Overlay "RST" at 36223.62,15976.69 h39.37; Top Overlay "EN" at 36223.62,16075.12 h39.37; Top Overlay "GND" at 36223.62,16173.54 h39.37; Top Overlay "VOUT" at 36223.62,16271.97 h39.37; Top Overlay "Low-Dropout" at 35692.13,16401.5 h78.74 r90; Top Overlay "Regulator" at 35849.61,16480.24 h78.74 r90; Bottom Overlay "Regulator" at 35849.61,17110.16 h78.74 r90; Bottom Overlay "Low-Dropout" at 35711.81,17208.58 h78.74 r90
SW1: Top Overlay "LV Switcher" at 35800.47,18766.14 h150 r90; Top Overlay "GND" at 35052.44,19671.65 h118.11 r90; Top Overlay "Vin" at 35052.44,19317.32 h118.11 r90; Top Overlay "GND" at 36489.45,19809.45 h118.11 r90; Top Overlay "Vout" at 36489.45,19474.8 h118.11 r90; Top Overlay "PG" at 36371.34,19081.1 h118.11; Top Overlay "SYNC" at 36233.54,19179.53 h118.11; Top Overlay "EN" at 36371.34,19277.95 h118.11; Bottom Overlay "LV Switcher" at 35800.47,20301.57 h150 r90
SW2: Top Overlay "LV Switcher" at 36000.47,21344.88 h150 r90; Top Overlay "GND" at 35252.44,22250.39 h118.11 r90; Top Overlay "Vin" at 35252.44,21896.06 h118.11 r90; Top Overlay "GND" at 36689.45,22388.19 h118.11 r90; Top Overlay "Vout" at 36689.45,22053.54 h118.11 r90; Top Overlay "PG" at 36571.34,21659.84 h118.11; Top Overlay "SYNC" at 36433.54,21758.27 h118.11; Top Overlay "EN" at 36571.34,21856.69 h118.11; Bottom Overlay "LV Switcher" at 36000.47,22880.31 h150 r90
TRX1: Top Overlay "TRX" at 32100.2,21081.06 h150; Top Overlay "TRX" at 31702.95,21085.39 h150
TRX2: Top Overlay "TRX" at 32129.75,15026.77 h150; Top Overlay "TRX" at 31732.5,15031.1 h150